# EAGLE board LNA_V1 (EAGLE 6.5.0)
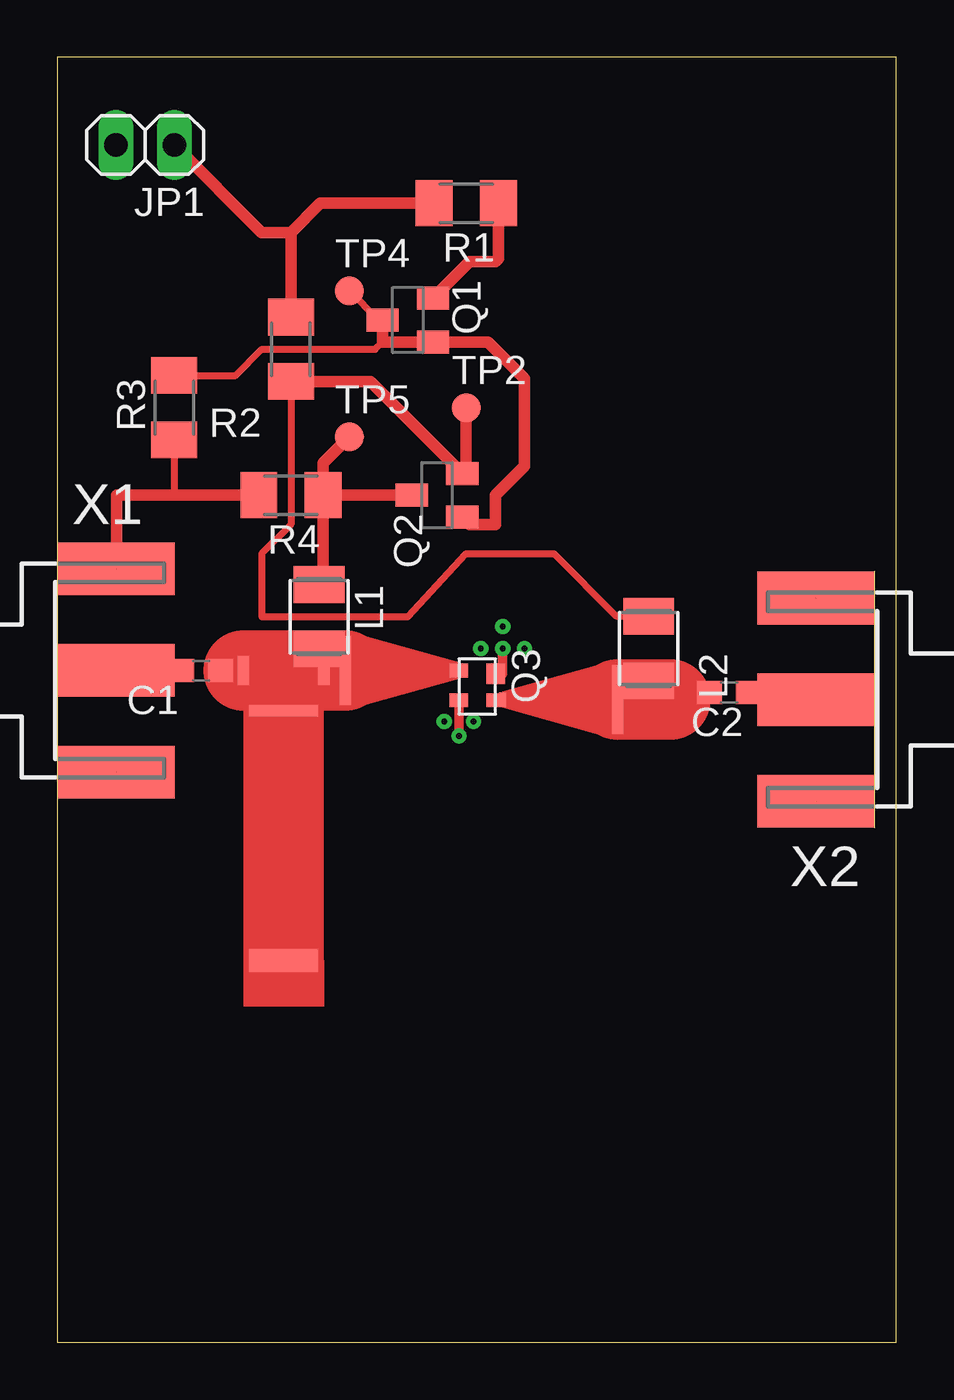
[diagram p0: board, top side]
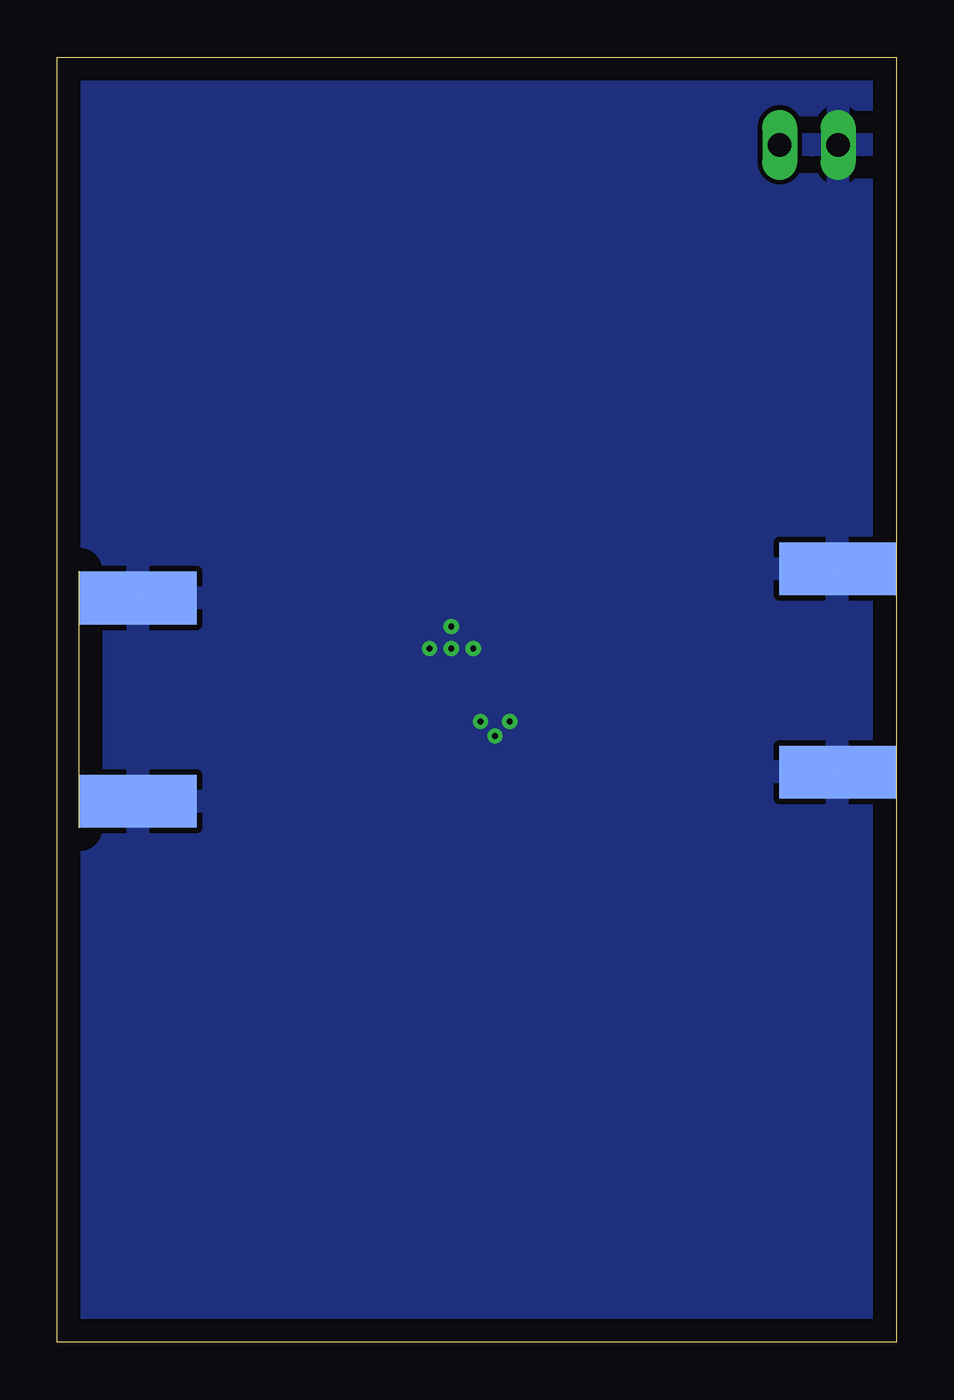
[diagram p1: board, bottom side, seen from below]

Size 36.5 x 55.87 mm. Coordinates in mm from the lower left corner, seen from the top.
Outline: 0,0 36.5,0 36.5,55.87 0,55.87 0,0
Copper layers (1*16): Top 0.035mm / dielectric 1.5mm / Bottom 0.035mm
Design rules "default": minimum track width 10mil, minimum drill 24mil, track to track 8mil, track to pad 8mil, pad to pad 8mil, via to via 8mil, smd to smd 8mil, copper to edge 40mil, drill to drill 8mil, minimum pad ring 10mil, minimum via ring 8mil, stop-mask expansion 4mil, vias tented up to drill 0mil, thermal gap 10mil

## Footprints (pad centres in the part's own frame; a part is rotated, then mirrored left to right if it is on the bottom)
C0603 = smd 1.1 x 1: 1 -0.85,0; 2 0.85,0
1X02 = drill 1.016 long: 1 -1.27,0; 2 1.27,0
L3225M = smd 1.6 x 2.2: 1 -1.4,0; 2 1.4,0
SOT23-BEC = smd 1 x 1.4: B -0.95,-1.1; C 0,1.1; E 0.95,-1.1
SOT-343 = smd 0.6 x 0.8: 1 1.3,1.6; 3 0,0; 4 1.3,0 | smd 0.9 x 0.8: 2 0.15,1.6
M1206 = smd 1.6 x 2: 1 -1.4,0; 2 1.4,0
B1,27 = smd 1.27 x 1.27: TP 0,0
TAPPERED_TL1 = smd 0.6 x 0.3: G1 0,-5.08 | smd 3 x 0.5: G2 0,-0.08
TEE_TL1 = smd 3 x 0.5: T_B 0,-0.475 | smd 0.5 x 1.27: T_L -1.745,1.27; T_R 1.745,1.27
OPEN_STUB1 = smd 3 x 1: P$1 0,0
J502-ND-142-0701-871/876 = smd 5.08 x 2.286: 1 2.565,0; G@1 2.565,4.42; G@2 2.565,-4.42 | smd 5.08 x 2.286 bottom: G@3 2.565,4.42; G@4 2.565,-4.42

## Placement (x,y rotation side)
C1  [C0603]  6.25,29.21 180 top
C2  [C0603]  29.21,28.26 180 top
JP1  [1X02]  3.81,52.07 180 top
L1  820nH  [L3225M]  11.38,31.55 270 top
L2  820nH  [L3225M]  25.72,30.16 270 top
Q1  MMBT3906LT1SMD  [SOT23-BEC]  15.24,44.45 90 top
Q2  MMBT3906LT1SMD  [SOT23-BEC]  16.51,36.83 90 top
Q3  SAV-541+  [SOT-343]  17.46,29.21 270 top
R1  3k  [M1206]  17.78,49.53 180 top
R2  15  [M1206]  10.16,43.18 90 top
R3  4320  [M1206]  5.08,40.64 270 top
R4  4320  [M1206]  10.16,36.83 180 top
TP2  TPB1,27  [B1,27]  17.78,40.64 0 top
TP4  TPB1,27  [B1,27]  12.7,45.72 0 top
TP5  TPB1,27  [B1,27]  12.7,39.37 0 top
U$1  TAPPERED_TL1  [TAPPERED_TL1]  12.43,29.21 90 top
U$2  TEE_TL1  [TEE_TL1]  9.84,27.94 0 top
U$3  OPEN_STUB1  [OPEN_STUB1]  9.84,16.59 0 top
U$4  TAPPERED_TL1  [TAPPERED_TL1]  24.45,27.94 270 top
X1  SMA-142-0701-871/876  [J502-ND-142-0701-871/876]  0,29.21 0 top
X2  SMA-142-0701-871/876  [J502-ND-142-0701-871/876]  35.56,27.94 180 top

## Library data of the parts
C1 C2 R1-R4 = rcl
JP1 = pinhead
L1 L2 = resistor
Q1 Q2 = transistor-pnp
Q3 U$1-U$4 = ECE532_Parts
TP2 TP4 TP5 = testpad
X1 X2 = con-coax; MF: JOHNSON COMPONENTS; MPN: 142-0701-871; OC_FARNELL: 1339835; OC_NEWARK: 91B6105

## Nets
+3.3V: JP1.1 R1.2 R2.2
GND: JP1.2 Q3.2 Q3.4 R3.2 R4.2 X1.G@1 X1.G@2 X1.G@3 X1.G@4 X2.G@1 X2.G@2 X2.G@3 X2.G@4
N$1: Q1.B Q1.C Q2.B R3.1 TP4.TP
N$2: L1.1 Q2.C R4.1 TP5.TP
N$3: Q3.3 U$1.G1
N$4: Q1.E R1.1
N$5: U$1.G2 U$2.T_R
N$6: L2.1 Q2.E R2.1 TP2.TP
N$7: C1.1 L1.2 U$2.T_L
N$8: U$2.T_B U$3.P$1
N$9: C1.2 X1.1
N$10: C2.2 L2.2 U$4.G2
N$11: C2.1 X2.1
N$12: Q3.1 U$4.G1

## Tracks (layer width: path | path; a pad name or v marks a point on that pad's centre or on a via)
+3.3V
  Top 0.5: R2.2 10.16,48.26 | 10.16,48.26 11.43,49.53 R1.2 | 10.16,48.26 8.89,48.26 JP1.1
GND  (via drill 0.25)  (4 unrouted)
  Top 0.3: R3.2 5.08,36.83
  Top 0.406: Q3.2 19.37,29.06 v19.37,30.16 | Q3.4 v17.46,26.35
  Top 0.5: R4.2 5.08,36.83 2.56,36.83 X1.G@3
  other vias: 19.37,31.11 20.32,30.16 18.41,30.16 16.83,26.99 18.1,26.99
  pour Bottom: 44.45,-1.27 43.18,85.09 0,85.09 0,-1.27
N$1
  Top 0.3: R3.1 7.75,42.04 8.89,43.18 13.82,43.18 14.14,43.5 | 13.97,44.45 TP4.TP
  Top 0.5: 13.97,44.45 Q1.C 14.14,43.5 Q1.B 18.73,43.5 20.32,41.91 20.32,38.1 19.05,36.83 19.05,35.56 17.93,35.56 Q2.B
N$2
  Top 0.5: 11.56,33.15 R4.1 | R4.1 Q2.C | R4.1 11.56,38.23 TP5.TP
  Top 1: L1.1 11.56,33.15
N$3
  Top 0.3: U$1.G1 Q3.3
N$4
  Top 0.5: Q1.E 17.93,46.99 19.05,46.99 19.18,47.12 R1.1
N$5
  Top 3.49: U$2.T_R U$1.G2
N$6
  Top 0.3: R2.1 10.16,35.56 8.89,34.29 8.89,31.55 15.24,31.55 17.78,34.29 21.59,34.29 24.32,31.56 L2.1
  Top 0.5: R2.1 13.61,41.78 Q2.E 17.78,37.78 TP2.TP
N$7
  Top 0.1: C1.1 U$2.T_L | 8.26,29.21 8.57,29.21 L1.2
  Top 3.49: U$2.T_L 8.26,29.21
N$8
  Top 3.49: U$2.T_B U$3.P$1
N$9
  Top 0.406: X1.1 C1.2
N$10
  Top 0.3: C2.2 26.35,28.26 | L2.2 26.22,28.26 26.35,28.26 | 26.35,28.26 26.67,27.94
  Top 3.49: U$4.G2 26.67,27.94
N$11
  Top 0.3: X2.1 30.38,27.94 C2.1
N$12
  Top 0.3: Q3.1 19.34,27.91 U$4.G1